# Altium PCB Copy of 408HR_pcbminions.PcbDoc
Units mm, origin at the board's own origin, x right, y up, seen from the top; angles counter-clockwise.
Board outline 100 x 100 mm, 4 copper layers (Top Layer, Layer 1, Layer 2, Bottom Layer), stack 0.81 mm thick; 18 components, 18 nets, 84 pads, 0 vias.
Unrouted connection lines stored in the file: 49.
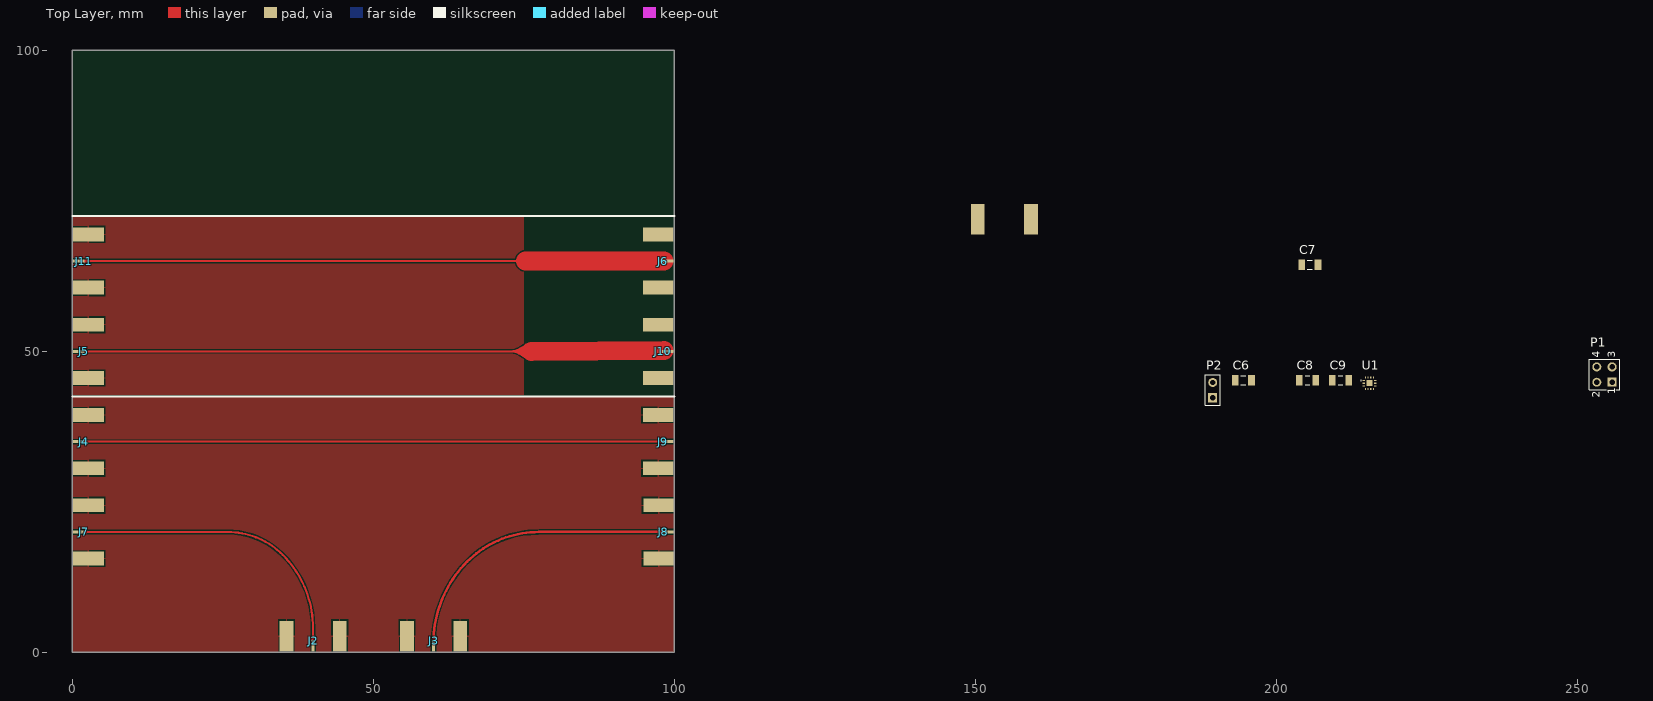
[diagram p0: Top Layer view]
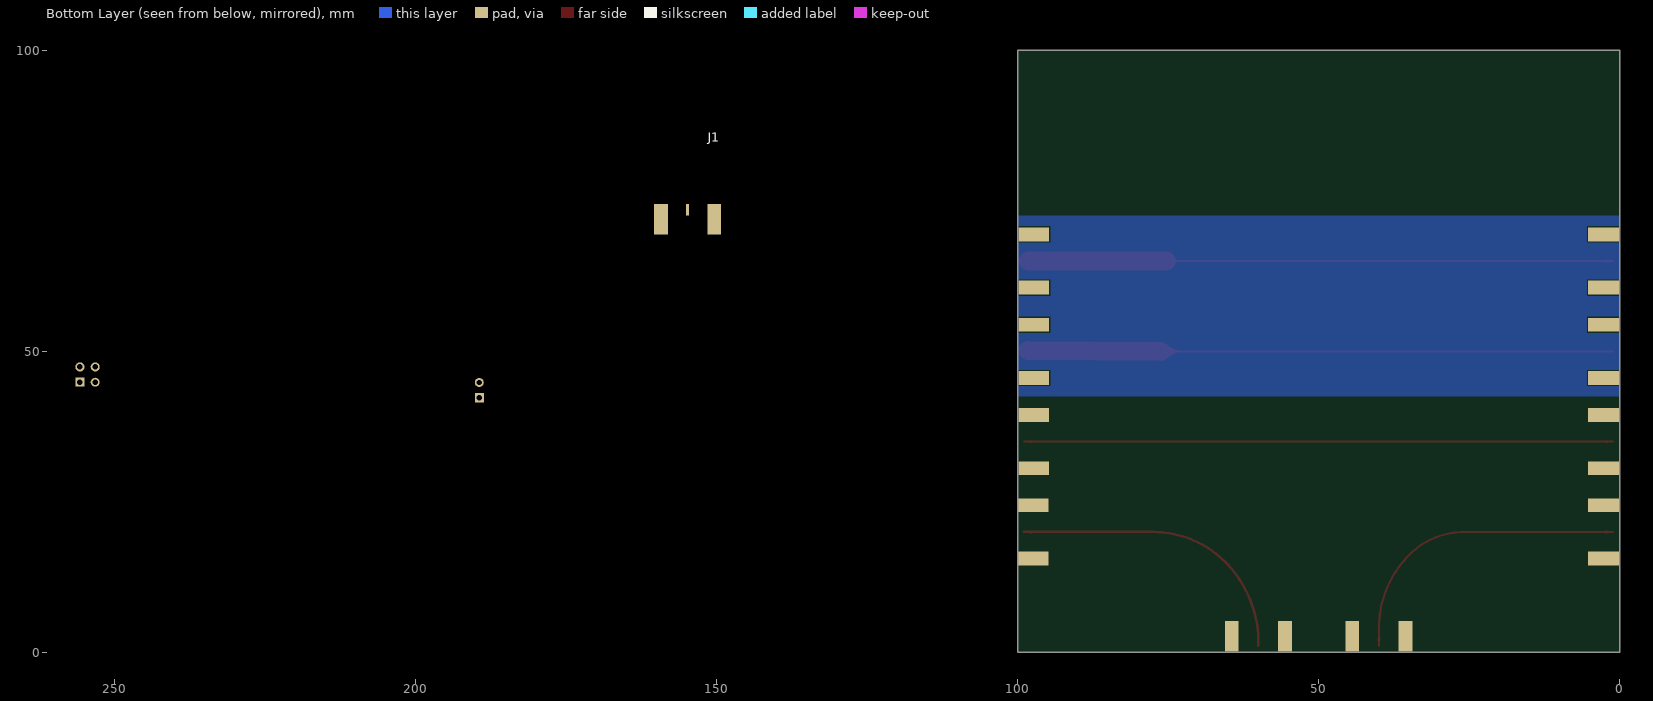
[diagram p1: Bottom Layer view, seen from below]
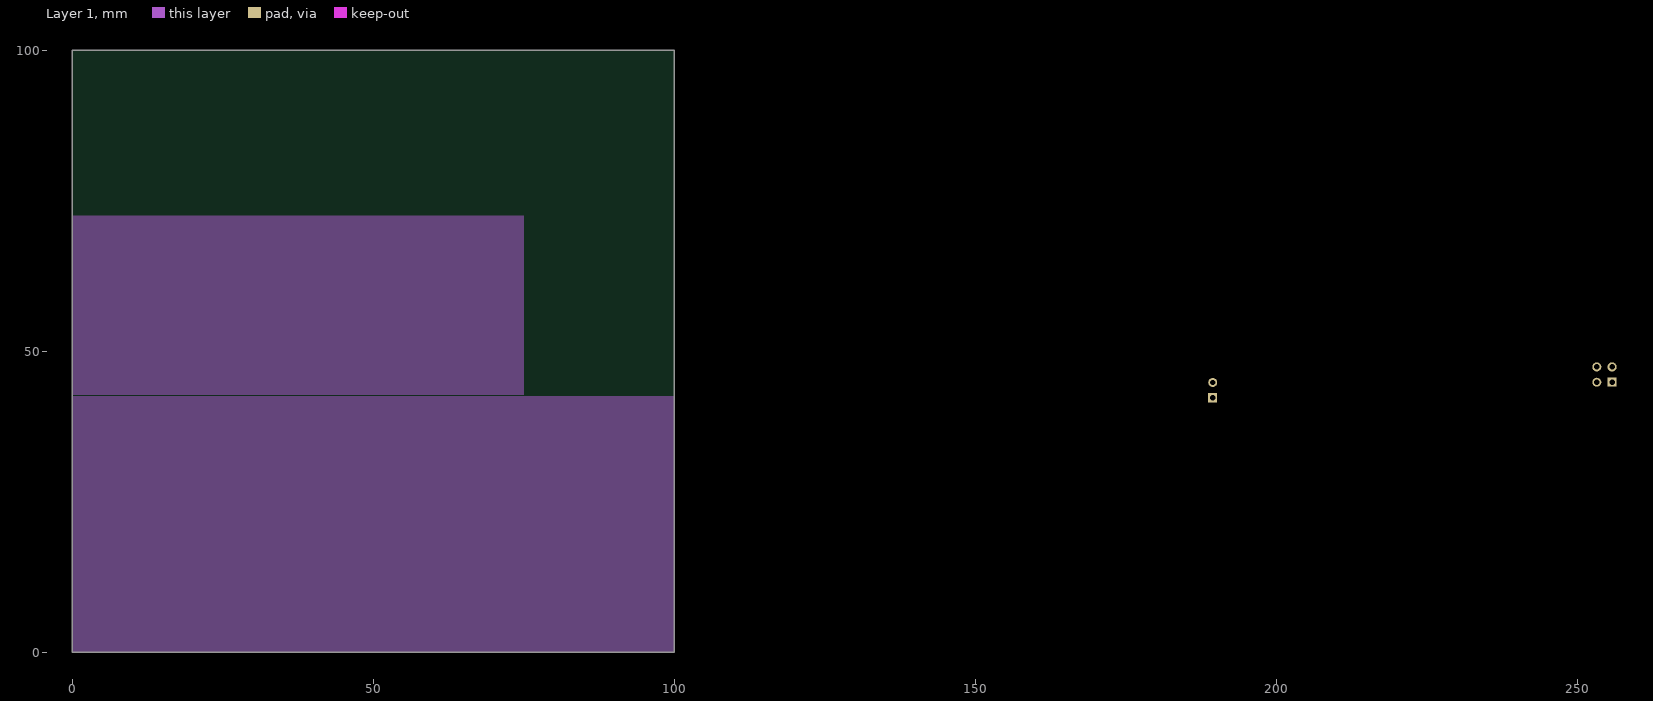
[diagram p2: Layer 1]
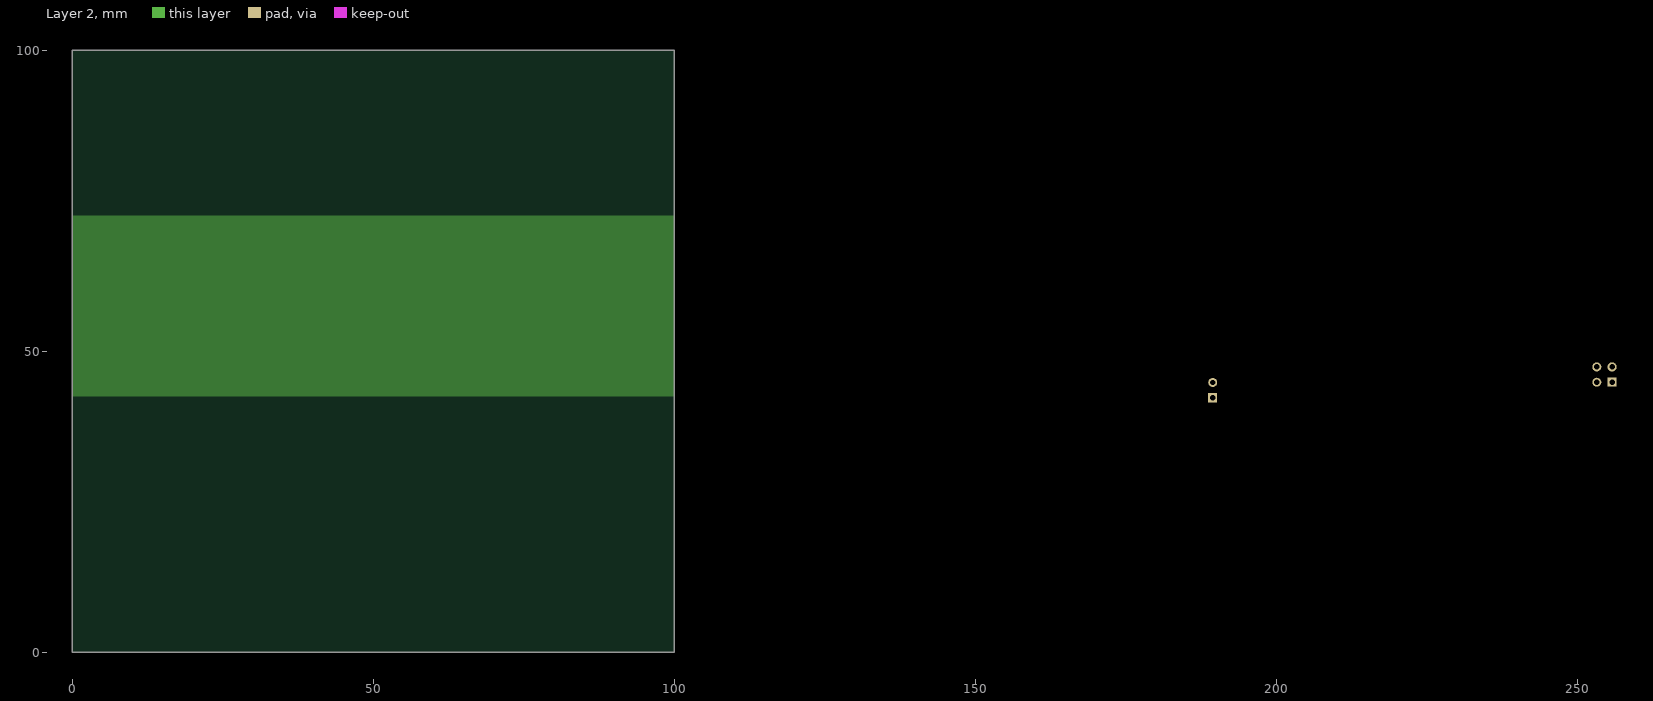
[diagram p3: Layer 2]

## Layer stack, top to bottom
Top Solder: solder mask 0.0102, Solder Resist, Dk 3.5
Top Layer: signal copper 0.035
Isola 408HR-1: prepreg 0.175, FR4, Dk 3.64
Layer 1: signal copper 0.035
Isola 408HR-Core: dielectric 0.32, FR-4, Dk 3.64
Layer 2: signal copper 0.035
Isola 408HR-2: prepreg 0.175, FR4, Dk 3.64
Bottom Layer: signal copper 0.035
Bottom Solder: solder mask 0.0102, Solder Resist, Dk 3.5

## Board outline
0,0 100,0 100,100 0,100

## Design rules (kind name [scope] priority, off if disabled: settings)
Clearance "Schematic Clearance Constraint_9" [InNet('TRAN_sharp')] p1: gap=0.254 ignorepadtopadclearanceinfootprint=FALSE
Clearance "Schematic Clearance Constraint_4" [InNet('TRAN_smooth')] p2: gap=0.254 ignorepadtopadclearanceinfootprint=FALSE
Clearance "Schematic Clearance Constraint_3" [InNet('CPWG45')] p3: gap=0.254 ignorepadtopadclearanceinfootprint=FALSE
Clearance "Schematic Clearance Constraint_2" [InNet('CPWG50')] p4: gap=0.254 ignorepadtopadclearanceinfootprint=FALSE
Clearance "Schematic Clearance Constraint_1" [InNet('CPWG55')] p5: gap=0.254 ignorepadtopadclearanceinfootprint=FALSE
Clearance "Schematic Clearance Constraint_8" [InNet('RF2')] p6: gap=0.127 ignorepadtopadclearanceinfootprint=FALSE except(0: Arc-Hole Track-Hole SMDPad-Hole THPad-Hole Via-Hole Fill-Hole Poly-Hole Region-Hole Text-Hole)
Clearance "Schematic Clearance Constraint_7" [InNet('RF3')] p7: gap=0.127 ignorepadtopadclearanceinfootprint=FALSE except(0: Arc-Hole Track-Hole SMDPad-Hole THPad-Hole Via-Hole Fill-Hole Poly-Hole Region-Hole Text-Hole)
Clearance "Schematic Clearance Constraint_6" [InNet('RF1')] p8: gap=0.127 ignorepadtopadclearanceinfootprint=FALSE except(0: Arc-Hole Track-Hole SMDPad-Hole THPad-Hole Via-Hole Fill-Hole Poly-Hole Region-Hole Text-Hole)
Clearance "Schematic Clearance Constraint_5" [InNet('RF4')] p9: gap=0.127 ignorepadtopadclearanceinfootprint=FALSE except(0: Arc-Hole Track-Hole SMDPad-Hole THPad-Hole Via-Hole Fill-Hole Poly-Hole Region-Hole Text-Hole)
Clearance "Schematic Clearance Constraint" [InNet('RFC')] p10: gap=0.127 ignorepadtopadclearanceinfootprint=FALSE except(0: Arc-Hole Track-Hole SMDPad-Hole THPad-Hole Via-Hole Fill-Hole Poly-Hole Region-Hole Text-Hole)
Clearance [All] p11: gap=0.254 ignorepadtopadclearanceinfootprint=FALSE except(0: Arc-Hole Track-Hole SMDPad-Hole THPad-Hole Via-Hole Fill-Hole Poly-Hole Region-Hole Text-Hole)
MaxMinImpedance "Schematic Impedance Constraint" [InNet('CPWG55')] p1: minimum=45.00 maximum=45.00
MaxMinImpedance "Schematic Impedance Constraint_3" [InNet('CPWG55')] p2: minimum=55.00 maximum=55.00
MaxMinImpedance "Schematic Impedance Constraint_2" [InNet('CPWG50')] p3: minimum=50.00 maximum=50.00
MaxMinImpedance "Schematic Impedance Constraint_1" [InNet('CPWG45')] p4: minimum=45.00 maximum=45.00
MaxMinImpedance [InNetClass('All Nets')] p5: minimum=40.00 maximum=60.00
PolygonConnect [All] p1: connectstyle=Relief reliefconductorwidth=0.254 reliefentries=4 polygonreliefangle="90 Angle" airgapwidth=0.254
RoomDefinition U_RF_switch_ckt [InComponentClass('U_RF_switch_ckt')] p1: confinementstyle=ConfineIn formatcopy=TRUE lockcomponents=FALSE outline 187.88,40.767 217.09,40.767 217.09,48.895 187.88,48.895
RoutingVias [All] p1: holewidth=0.711 width=1.27 viastyle="Through Hole" minholewidth=0.711 minwidth=1.27 maxholewidth=0.711 maxwidth=1.27
SolderMaskExpansion [All] p1: expansion=0.102
Width "Schematic Width Constraint_12" [InNet('CPWG55')] p1: maxlimit=0.417 minlimit=0.417 preferedwidth=0.348 midlayer1_prefwidth=0.254 midlayer2_prefwidth=0.254 minimp=50.000000 maximp=50.000000 favimp=50.000000
Width "Schematic Width Constraint_3" [InNet('TRAN_sharp')] p2: maxlimit=3.162 minlimit=0.254 preferedwidth=0.348 toplayer_minwidth=0.348 midlayer1_maxwidth=0.254 midlayer1_prefwidth=0.254 midlayer2_maxwidth=0.254 midlayer2_prefwidth=0.254 bottomlayer_minwidth=0.348 minimp=50.000000 maximp=50.000000 favimp=50.000000
Width "Schematic Width Constraint_10" [InNet('TRAN_smooth')] p3: maxlimit=3.162 minlimit=0.254 preferedwidth=0.348 toplayer_minwidth=0.348 midlayer1_maxwidth=0.254 midlayer1_prefwidth=0.254 midlayer2_maxwidth=0.254 midlayer2_prefwidth=0.254 bottomlayer_minwidth=0.348 minimp=50.000000 maximp=50.000000 favimp=50.000000
Width "Schematic Width Constraint_4" [InNet('CPWG45')] p4: maxlimit=0.417 minlimit=0.417 preferedwidth=0.348 midlayer1_prefwidth=0.254 midlayer2_prefwidth=0.254 minimp=50.000000 maximp=50.000000 favimp=50.000000
Width "Schematic Width Constraint_2" [InNet('CPWG50')] p5: maxlimit=0.348 minlimit=0.348 preferedwidth=0.348 midlayer1_maxwidth=0.254 midlayer1_prefwidth=0.254 midlayer2_maxwidth=0.254 midlayer2_prefwidth=0.254 minimp=50.000000 maximp=50.000000 favimp=50.000000
Width "Schematic Width Constraint_1" [InNet('CPWG55')] p6: maxlimit=0.293 minlimit=0.293 preferedwidth=0.348 midlayer1_prefwidth=0.254 midlayer2_prefwidth=0.254 minimp=50.000000 maximp=50.000000 favimp=50.000000
Width "Schematic Width Constraint_8" [InNet('RF3')] p7: maxlimit=0.287 minlimit=0.254 preferedwidth=0.287 toplayer_minwidth=0.287 midlayer1_maxwidth=0.254 midlayer1_prefwidth=0.254 midlayer2_maxwidth=0.254 midlayer2_prefwidth=0.254 bottomlayer_minwidth=0.287 minimp=50.000000 maximp=50.000000 favimp=50.000000
Width "Schematic Width Constraint_7" [InNet('RF2')] p8: maxlimit=0.287 minlimit=0.254 preferedwidth=0.287 toplayer_minwidth=0.287 midlayer1_maxwidth=0.254 midlayer1_prefwidth=0.254 midlayer2_maxwidth=0.254 midlayer2_prefwidth=0.254 bottomlayer_minwidth=0.287 minimp=50.000000 maximp=50.000000 favimp=50.000000
Width "Schematic Width Constraint_6" [InNet('RF1')] p9: maxlimit=0.287 minlimit=0.254 preferedwidth=0.287 toplayer_minwidth=0.287 midlayer1_maxwidth=0.254 midlayer1_prefwidth=0.254 midlayer2_maxwidth=0.254 midlayer2_prefwidth=0.254 bottomlayer_minwidth=0.287 minimp=50.000000 maximp=50.000000 favimp=50.000000
Width "Schematic Width Constraint_5" [InNet('RF4')] p10: maxlimit=0.287 minlimit=0.254 preferedwidth=0.287 toplayer_minwidth=0.287 midlayer1_maxwidth=0.254 midlayer1_prefwidth=0.254 midlayer2_maxwidth=0.254 midlayer2_prefwidth=0.254 bottomlayer_minwidth=0.287 minimp=50.000000 maximp=50.000000 favimp=50.000000
Width "Schematic Width Constraint" [InNet('RFC')] p11: maxlimit=0.287 minlimit=0.254 preferedwidth=0.287 toplayer_minwidth=0.287 midlayer1_maxwidth=0.254 midlayer1_prefwidth=0.254 midlayer2_maxwidth=0.254 midlayer2_prefwidth=0.254 bottomlayer_minwidth=0.287 minimp=50.000000 maximp=50.000000 favimp=50.000000
Width [All] p12: maxlimit=0.254 minlimit=0.254 preferedwidth=0.254
30 further rules are at their usual default settings.

## Classes and differential pairs
component class 408HR_pcbminions: J1 J2 J3 J4 J5 J6 J7 J8 J9 J10 J11 P1
component class U_RF_switch_ckt: C6 C7 C8 C9 P2 U1

## Components (designator, comment, footprint, x,y, rotation, side; value= is the part's Value field where it differs from the comment)
C6 "Cap Semi" C1206 194.484,45.212 r0 top value=100pF
C7 "Cap Semi" C1206 205.533,64.389 r0 top value=100pF
C8 "Cap Semi" C1206 205.152,45.212 r0 top value=100pF
C9 "Cap Semi" C1206 210.613,45.212 r0 top value=100pF
J1 "SMA 50 Ohm edge" "SMA-OSHPARK-4L-1.6MM- ALT3" 154.813,74.511 r270 bottom
J2 "SMA 50 Ohm edge" "SMA-OSHPARK-4L-1.6MM- ALT3" 40,0.127 r90 top
J3 "SMA 50 Ohm edge" "SMA-OSHPARK-4L-1.6MM- ALT3" 60,0.127 r90 top
J4 "SMA 50 Ohm edge" "SMA-OSHPARK-4L-1.6MM- ALT3" 0.127,35 r0 top
J5 "SMA 50 Ohm edge" "SMA-OSHPARK-4L-1.6MM- ALT3" 0.127,50 r0 top
J6 "SMA 50 Ohm edge" "SMA-OSHPARK-4L-1.6MM- ALT3" 99.873,65 r180 top
J7 "SMA 50 Ohm edge" "SMA-OSHPARK-4L-1.6MM- ALT3" 0.127,20 r0 top
J8 "SMA 50 Ohm edge" "SMA-OSHPARK-4L-1.6MM- ALT3" 99.949,20 r180 top
J9 "SMA 50 Ohm edge" "SMA-OSHPARK-4L-1.6MM- ALT3" 99.873,35 r180 top
J10 "SMA 50 Ohm edge" "SMA-OSHPARK-4L-1.6MM- ALT3" 99.873,50 r180 top
J11 "SMA 50 Ohm edge" "SMA-OSHPARK-4L-1.6MM- ALT3" 0.127,65 r0 top
P1 "Header 2X2" HDR2X2 255.727,44.869 r90 top
P2 "Header 2" HDR1X2 189.404,42.291 r90 top
U1 "SKY13575-639LF" *QFN45P200X200X55-15N 215.439,44.704 r0 top

## Footprints (in the part's own frame and the unit in brackets; to place one, negate y for a bottom-side part, rotate by r counter-clockwise, add the part's x,y. Pads: shape width x height; smd on the part's side, far side on the other; paste and mask are expansions set on the pad)
*QFN45P200X200X55-15N [mm]
  rect 0.395x0.2 smd: 1(-0.953,0.45) 2(-0.953,0) 3(-0.953,-0.45) 8(0.953,-0.45) 9(0.953,0) 10(0.953,0.45)
  rect 0.2x0.395 smd: 4(-0.675,-0.953) 5(-0.225,-0.953) 6(0.225,-0.953) 7(0.675,-0.953) 11(0.675,0.953) 12(0.225,0.953) 13(-0.225,0.953) 14(-0.675,0.953)
  rect 1x1 smd: 15(0,0)
  silkscreen extent -1.45,0.41 -1.35,0.51
C1206 [mm] "Chip Capacitor, Body 3.2x1.6mm, IPC High Density"
  rect 1.1x1.7 smd: 1(-1.35,0) 2(1.35,0)
  silkscreen extent -0.4,-0.75 0.4,0.75, body extent -1.7,-0.9 1.7,0.9, height 1.3
HDR1X2 [mm] "Connector; Header; 2 Position"
  rect 1.5x1.5 hole 0.9: 1(0,0)
  round 1.5 hole 0.9: 2(2.54,0)
  silkscreen extent -1.27,-1.27 3.81,1.27
HDR2X2 [mm] "Connector; Header; 2x2 Position"
  rect 1.5x1.5 hole 0.9: 1(0,0)
  round 1.5 hole 0.9: 2(0,2.54) 3(2.54,0) 4(2.54,2.54)
  silkscreen extent -1.27,-1.27 3.81,3.81
"SMA-OSHPARK-4L-1.6MM- ALT3" [mil] "Short and thin signal pin"
  rect 200x90 smd far side: GND(101,-174) GND(101,174)
  rect 200x90 smd: GND(101,-174) GND(101,174)
  rect 75x20 smd: SIG(38.5,0)

## Part data
C6 C7 C8 C9: "Capacitor (Semiconductor SIM Model)", LatestRevisionDate=29-May-2009, LatestRevisionNote="IPC-7351 Footprint Added.", PackageDescription="Chip Capacitor", PackageReference=C1206, Published=8-Jun-2000, Publisher="Altium Limited"
J1 J2 J3 J4 J5 J6 J7 J8 J9 J10 J11: library part SMA-OSHPARK-4L-1.6MM-ALT3, Package=SMA-OSHPARK-4L-1.6MM, Supplier Part Number 1=J658-ND, DeviceName=-OSHPARK-4L-1.6MM, DeviceSetName=SMA, GateName_1=G1, LibraryName=dword1511-connectors, Supplier 1=Digi-Key, SymbolName_1=COAX
P1: "Header, 2-Pin, Dual row", LatestRevisionDate=17-Jul-2002, LatestRevisionNote="Re-released for DXP Platform.", Publisher="Altium Limited"
P2: "Header, 2-Pin", LatestRevisionDate=17-Jul-2002, LatestRevisionNote="Re-released for DXP Platform.", Publisher="Altium Limited"

## Nets (pads, with @x,y where several pads share a name; then routed paths per layer and width w, separated by ;. In a path a pad name is that pad's centre, name@x,y a point inside that pad or via, vN(x,y) a via of type N, cw(c..) or ccw(c..) an arc to the next point about the centre after c; other vN are vias at no path point)
3V3: C6.2 C7.2 P1.3 P1.4 U1.10
CPWG45: J4.SIG J9.SIG | length 97.8
  Top Layer w0.348: J4.SIG J9.SIG
CPWG50: J2.SIG J7.SIG | length 51.3
  Top Layer w0.348: J7.SIG 25.81,20 cw(c25.81,7.095) 34.935,16.22 cw(c22.753,4.038) 39.981,4.038 39.981,1.124 J2.SIG
CPWG55: J3.SIG J8.SIG | length 50.2
  Top Layer w0.348: J3.SIG J3.SIG@60.019,1.124
  Top Layer w0.417: J3.SIG 60,1.643 cw(c78.981,1.643) 65.559,15.064 cw(c77.476,3.148) 77.476,20 J8.SIG
GND: C6.1 C7.1 J1.GND P1.1 P1.2 U1.1 U1.3 U1.4 U1.6 U1.11 U1.13
GND_TRAN: J5.GND J6.GND J10.GND J11.GND
GNDCPWG: J2.GND J3.GND J4.GND J7.GND J8.GND J9.GND
RF1: U1.14
RF2: U1.12
RF3: U1.7
RF4: U1.5
RFC: J1.SIG U1.2
TRAN_sharp: J6.SIG J11.SIG | length 96.6
  Top Layer w0.348: J11.SIG 74.775,65
  Top Layer w3.162: 75.3,65.025 J6.SIG@98.25,65.025
TRAN_smooth: J5.SIG J10.SIG | length 97.1
  Top Layer w0.348: J5.SIG 76.275,50
  Top Layer w3.162: 76.275,50 J10.SIG@98.25,50.125
VC1: C9.2 U1.8
VC1IN: C9.1
VC2: C8.2 U1.9
VC2IN: C8.1
pads on no net: P2.1 P2.2 U1.15

## Polygon pours and split planes (outlines as drawn)
GND_TRAN on Top Layer "GND-TRAN1" (solid, pour order 5): 0,72.5 75,72.5 75,42.5 0,42.5
GNDCPWG on Top Layer "GND-CPWG-1" (solid, pour order 0): 0,42.5 100,42.5 100,0 0,0
no net on Layer 1 "GND-TRAN2" (solid, pour order 6): 0,72.5 75,72.5 75,42.5 0,42.5
GNDCPWG on Layer 1 "GND-CPWG-2" (solid, pour order 2): 0,42.5 100,42.5 100,0 0,0
no net on Layer 2 "GND-TRAN3" (solid, pour order 7): 0,72.5 100,72.5 100,42.5 0,42.5
no net on Bottom Layer "GND-TRAN4" (solid, pour order 8): 0,72.5 100,72.5 100,42.5 0,42.5

## Silkscreen, mask and mechanical layers (free items; w line width, h text height)
Top Overlay:
  lines w0.335: 0,42.5 100,42.5 ; 0,72.5 100,72.5

## Text inside footprints (layer, text, board x,y; h text height)
P1: Top Overlay "1" at 256.235,42.837 h1.27 r90; Top Overlay "2" at 253.695,42.329 h1.27 r90; Top Overlay "4" at 253.695,48.933 h1.27 r90; Top Overlay "3" at 256.235,48.933 h1.27 r90